# EAGLE board TSOC_NEOLED_R0_1 (EAGLE 6.6.0)
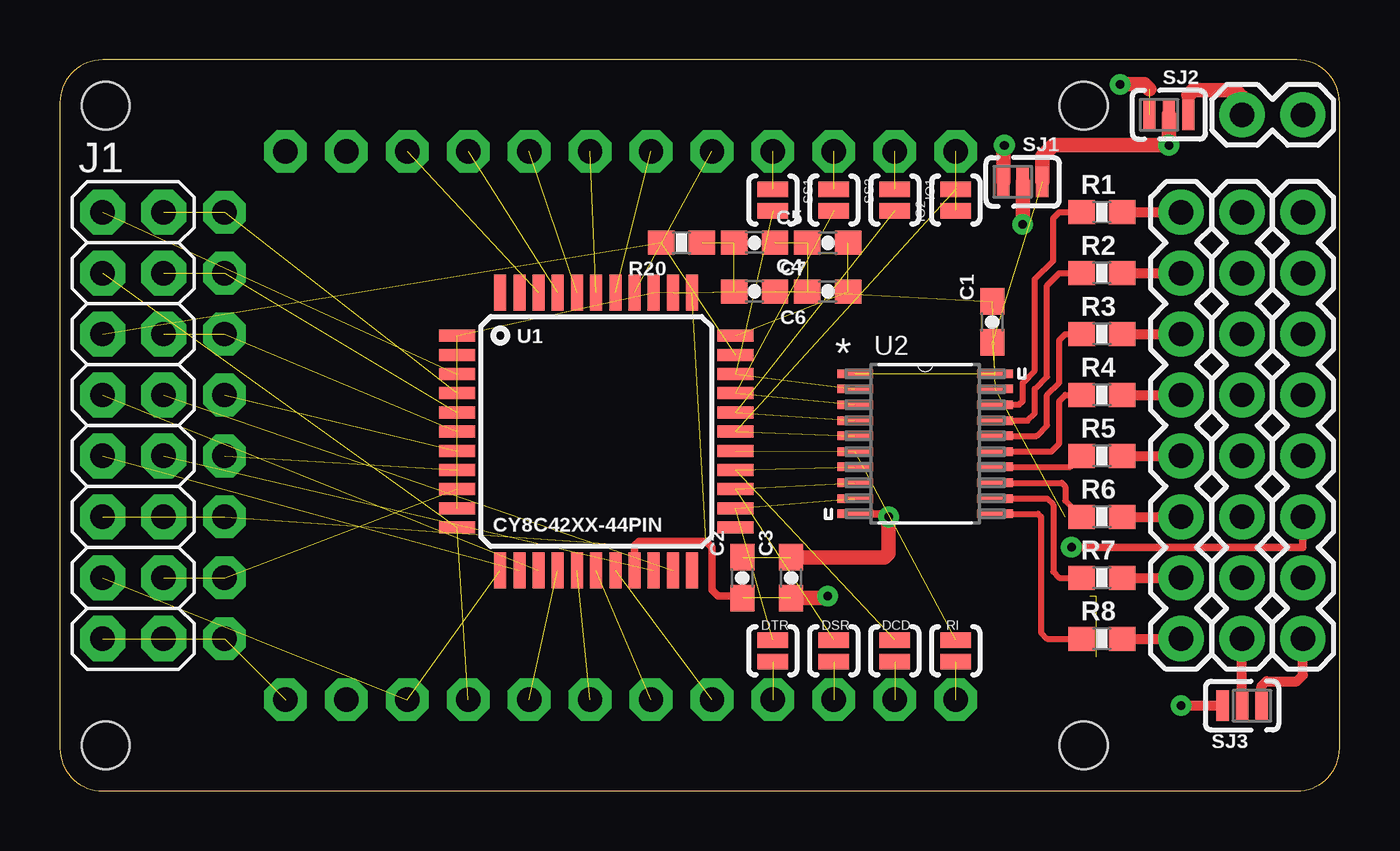
[diagram p0: board, top side]
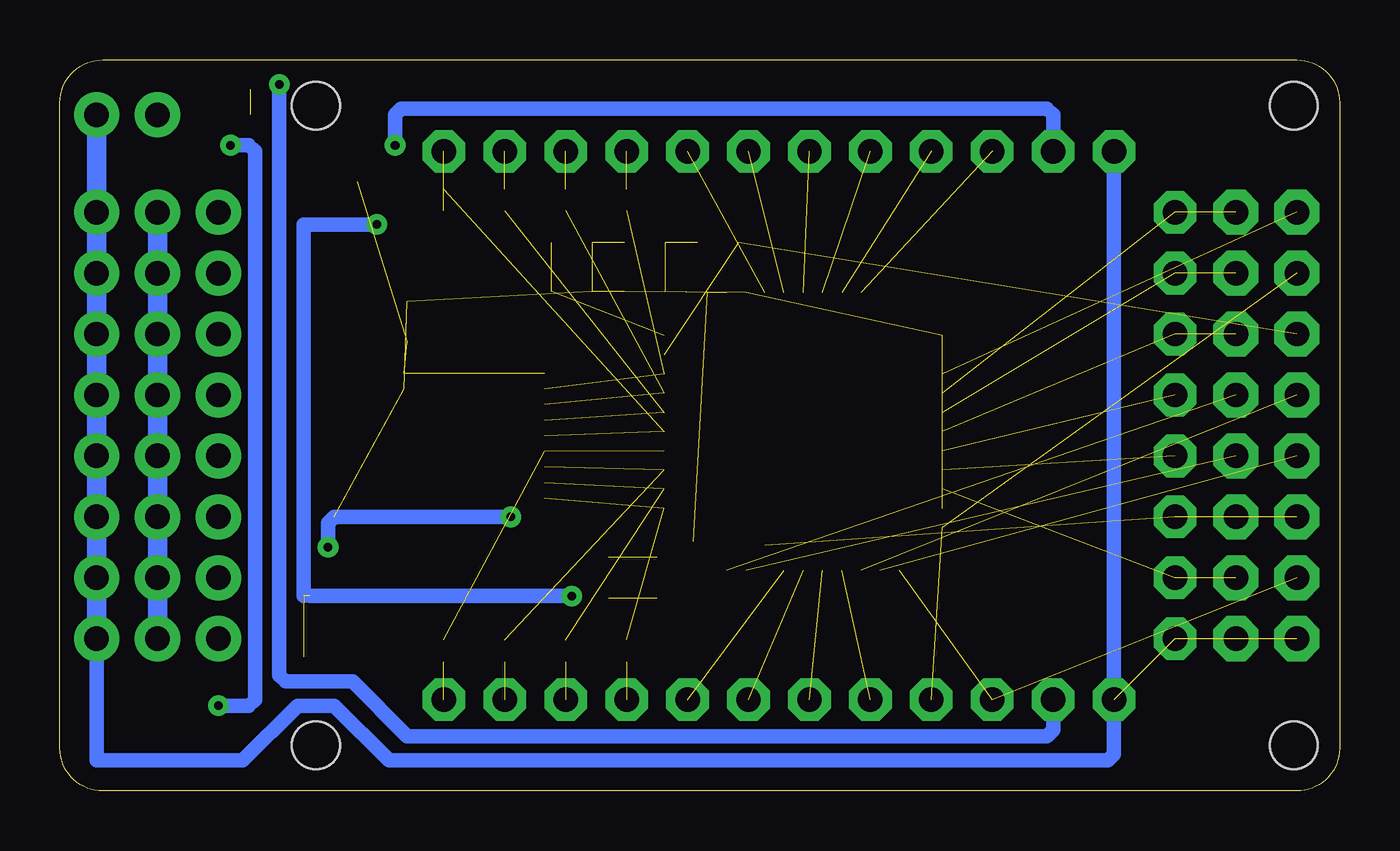
[diagram p1: board, bottom side, seen from below]

Size 53.34 x 30.48 mm. Coordinates in mm from the lower left corner, seen from the top.
Copper layers (1*16): Top 0.035mm / dielectric 1.5mm / Bottom 0.035mm
Design rules "PatternAgents_7mil": minimum track width 7mil, minimum drill 14mil, track to track 7mil, track to pad 7mil, pad to pad 7mil, via to via 7mil, smd to smd 7mil, copper to edge 7mil, drill to drill 7mil, minimum pad ring 12mil, minimum via ring 10mil, stop-mask expansion 4mil, vias tented up to drill 25mil, thermal gap 7mil

## Footprints (pad centres in the part's own frame; a part is rotated, then mirrored left to right if it is on the bottom)
1X02 = drill 1.016 pad 1.88: 1 0,0; 2 2.54,0
0603-CAP = smd 1.1 x 1: 1 -0.85,0; 2 0.85,0
JMP-2-NO = smd 0.635 x 1.27: 1 -0.45,0; 2 0.45,0
2X8 = drill 1.016 pad 1.88 octagon: 1 0,0; 2 0,2.54; 3 2.54,0; 4 2.54,2.54; 5 5.08,0; 6 5.08,2.54; 7 7.62,0; 8 7.62,2.54; 9 10.16,0; 10 10.16,2.54; 11 12.7,0; 12 12.7,2.54; 13 15.24,0; 14 15.24,2.54; 15 17.78,0; 16 17.78,2.54
1X08_ROUND = drill 1.016 pad 1.88: 1 0,0; 2 2.54,0; 3 5.08,0; 4 7.62,0; 5 10.16,0; 6 12.7,0; 7 15.24,0; 8 17.78,0
0603-RES = smd 1.1 x 1: 1 -0.85,0; 2 0.85,0
JMP-3-1_2 = smd 0.508 x 1.27: 1 -0.813,0; 2 0,0; 3 0.813,0
TSOC-BB-S32 = drill 1.016 pad 1.778 octagon: 1B -11.43,-11.43; 1C -11.43,11.43; 1E 19.05,-8.89; 2B -8.89,-11.43; 2C -8.89,11.43; 2E 19.05,-6.35; 3B -6.35,-11.43; 3C -6.35,11.43; 3E 19.05,-3.81; 4B -3.81,-11.43; 4C -3.81,11.43; 4E 19.05,-1.27; 5B -1.27,-11.43; 5C -1.27,11.43; 5E 19.05,1.27; 6B 1.27,-11.43; 6C 1.27,11.43; 6E 19.05,3.81; 7B 3.81,-11.43; 7C 3.81,11.43; 7E 19.05,6.35; 8B 6.35,-11.43; 8C 6.35,11.43; 8E 19.05,8.89; 9B 8.89,-11.43; 9C 8.89,11.43; 10B 11.43,-11.43; 10C 11.43,11.43; 11B 13.97,-11.43; 11C 13.97,11.43; 12B 16.51,-11.43; 12C 16.51,11.43
TQFP-10X10-44 = smd 1.5 x 0.5: 1 -5.8,4; 2 -5.8,3.2; 3 -5.8,2.4; 4 -5.8,1.6; 5 -5.8,0.8; 6 -5.8,0; 7 -5.8,-0.8; 8 -5.8,-1.6; 9 -5.8,-2.4; 10 -5.8,-3.2; 11 -5.8,-4; 23 5.8,-4; 24 5.8,-3.2; 25 5.8,-2.4; 26 5.8,-1.6; 27 5.8,-0.8; 28 5.8,0; 29 5.8,0.8; 30 5.8,1.6; 31 5.8,2.4; 32 5.8,3.2; 33 5.8,4 | smd 0.5 x 1.5: 12 -4,-5.8; 13 -3.2,-5.8; 14 -2.4,-5.8; 15 -1.6,-5.8; 16 -0.8,-5.8; 17 0,-5.8; 18 0.8,-5.8; 19 1.6,-5.8; 20 2.4,-5.8; 21 3.2,-5.8; 22 4,-5.8; 34 4,5.8; 35 3.2,5.8; 36 2.4,5.8; 37 1.6,5.8; 38 0.8,5.8; 39 0,5.8; 40 -0.8,5.8; 41 -1.6,5.8; 42 -2.4,5.8; 43 -3.2,5.8; 44 -4,5.8
SOP65P640X120-20N = smd 1.473 x 0.356: 1 -2.921,2.921; 2 -2.921,2.286; 3 -2.921,1.626; 4 -2.921,0.965; 5 -2.921,0.33; 6 -2.921,-0.33; 7 -2.921,-0.965; 8 -2.921,-1.626; 9 -2.921,-2.286; 10 -2.921,-2.921; 11 2.921,-2.921; 12 2.921,-2.286; 13 2.921,-1.626; 14 2.921,-0.965; 15 2.921,-0.33; 16 2.921,0.33; 17 2.921,0.965; 18 2.921,1.626; 19 2.921,2.286; 20 2.921,2.921
TSOC-BB-BRD-PLUS = hole 2: 1.905,1.905; 28.575,1.905; 1.905,42.672; 28.575,42.672

## Placement (x,y rotation side)
5V  M02  [1X02]  49.28,28.19 0 top
C1  0.1uF  [0603-CAP]  38.86,19.56 90 top
C2  0.1uF  [0603-CAP]  28.45,8.89 90 top
C3  1uF  [0603-CAP]  30.48,8.89 90 top
C4  0.1uF  [0603-CAP]  28.96,20.83 0 top
C5  1uF  [0603-CAP]  28.96,22.86 0 top
C6  0.1uF  [0603-CAP]  32,20.83 180 top
C7  1uF  [0603-CAP]  32,22.86 180 top
DCD  [JMP-2-NO]  34.8,5.84 90 top
DSR  [JMP-2-NO]  32.26,5.84 90 top
DTR  [JMP-2-NO]  29.72,5.84 90 top
IO1  [JMP-2-NO]  34.8,24.64 270 top
IO2  [JMP-2-NO]  37.34,24.64 90 top
J1  [2X8]  1.78,24.13 270 top
J2  [1X08_ROUND]  51.82,24.13 270 top
J3  [1X08_ROUND]  46.74,24.13 270 top
J4  [1X08_ROUND]  49.28,24.13 270 top
R1  [0603-RES]  43.43,24.13 0 top
R2  [0603-RES]  43.43,21.59 0 top
R3  [0603-RES]  43.43,19.05 0 top
R4  [0603-RES]  43.43,16.51 0 top
R5  [0603-RES]  43.43,13.97 0 top
R6  [0603-RES]  43.43,11.43 0 top
R7  [0603-RES]  43.43,8.89 0 top
R8  [0603-RES]  43.43,6.35 0 top
R20  10K  [0603-RES]  25.91,22.86 180 top
RI  [JMP-2-NO]  37.34,5.84 90 top
SJ1  JMP-3-1_2  [JMP-3-1_2]  40.13,25.4 0 top
SJ2  JMP-3-1_2  [JMP-3-1_2]  46.23,28.19 0 top
SJ3  JMP-3-1_2  [JMP-3-1_2]  49.28,3.56 180 top
SS1  [JMP-2-NO]  29.72,24.64 270 top
SS2  [JMP-2-NO]  32.26,24.64 270 top
TSOC  TSOC-32-BB  [TSOC-BB-S32]  25.91,15.24 180 top
U1  CY8C42XX-44PIN  [TQFP-10X10-44]  22.35,14.99 0 top
U2  SN74HC245PW  [SOP65P640X120-20N]  36.07,14.48 0 top
U$3  TSOC-PCB-PLUS  [TSOC-BB-BRD-PLUS]  0,30.48 270 top

## Library data of the parts
5V J1-J4 R1-R8 = PatternAgents-ProtoPads
C1-C7 R20 = PatternAgents-Misc
DCD DSR DTR IO1 IO2 RI SJ1-SJ3 SS1 SS2 = PatternAgents-ProtoPads; BOM: EXCLUDE
TSOC U$3 = thingSoC
U1 = PatternAgents-Cypress
U2 = PatternAgents-TI; MPN: SN74HC245PW; OC_FARNELL: 1236221; OC_NEWARK: 13M5213; PACKAGE: TSSOP-20; SUPPLIER: Texas Instruments

## Nets
3V3: SJ1.1 TSOC.11B
5V0: SJ2.1 TSOC.11C
!DCD: DCD.1 TSOC.2C
!DSR: DSR.1 TSOC.3C
!DTR: DTR.1 TSOC.4C
!R!: RI.1 TSOC.1C
!XRES: J1.5 R20.2 U1.32
GND: 5V.2 C1.2 C2.2 C3.2 C4.2 C5.2 C6.2 C7.2 J1.15 J1.16 J2.1 J2.2 J2.3 J2.4 J2.5 J2.6 J2.7 J2.8 SJ3.1 TSOC.8E TSOC.12B TSOC.12C U1.1 U1.10 U1.36 U2.10 U2.19
IO1: IO1.1 TSOC.2B
IO2: IO2.1 TSOC.1B
N$1: J3.1 R1.2
N$2: J3.2 R2.2
N$3: J3.3 R3.2
N$4: J3.4 R4.2
N$5: J3.5 R5.2
N$6: J3.6 R6.2
N$7: J3.7 R7.2
N$8: J3.8 R8.2
N$9: R1.1 U2.18
N$10: R2.1 U2.17
N$11: R3.1 U2.16
N$12: R4.1 U2.15
N$13: R5.1 U2.14
N$14: R6.1 U2.13
N$15: R7.1 U2.12
N$16: R8.1 U2.11
P0_0: DTR.2 U1.24 U2.9
P0_1: DSR.2 U1.25 U2.8
P0_2: DCD.2 U1.26 U2.7
P0_3: RI.2 U1.27 U2.6
P0_4: IO2.2 U1.28 U2.5
P0_5: IO1.2 U1.29 U2.4
P0_6: SS2.2 U1.30 U2.3
P0_7: SS1.2 U1.31 U2.2
P1_0: TSOC.5B U1.37
P1_1: TSOC.6B U1.38
P1_2: TSOC.7B U1.39
P1_3: TSOC.8B U1.40
P1_4: TSOC.9B U1.41
P1_5: TSOC.10B U1.42
P1_6: U1.43
P1_7: U1.44
P2_0: U1.2
P2_1: J1.1 U1.3
P2_2: J1.2 TSOC.1E U1.4
P2_3: J1.4 TSOC.2E U1.5
P2_4: J1.6 TSOC.3E U1.6
P2_5: TSOC.4E U1.7
P2_6: TSOC.5E U1.8
P2_7: J1.14 TSOC.7E U1.9
P3_0: J1.3 TSOC.9C U1.11
P3_1: J1.13 TSOC.10C U1.12
P3_2: J1.9 U1.13
P3_3: J1.7 U1.14
P3_4: TSOC.8C U1.15
P3_5: TSOC.7C U1.16
P3_6: TSOC.6C U1.17
P3_7: TSOC.5C U1.18
P4_0: J1.10 U1.20
P4_1: J1.8 U1.21
P4_2: U1.22
P4_3: U1.23
SS1: SS1.1 TSOC.4B
SS2: SS2.1 TSOC.3B
VCC: C2.1 C3.1 C4.1 C5.1 J1.11 J1.12 R20.1 SJ1.2 TSOC.6E U1.19 U1.34 U1.35
VCCD: C6.1 C7.1 U1.33
VEXT: 5V.1 SJ2.3
VIN: C1.1 SJ1.3 SJ2.2 SJ3.3 U2.1 U2.20
VOUT: J4.1 J4.2 J4.3 J4.4 J4.5 J4.6 J4.7 J4.8 SJ3.2

## Tracks (layer width: path | path; a pad name or v marks a point on that pad's centre or on a via)
3V3  (via drill 0.36)
  Top 0.61: SJ1.1 39.32,26.87 v39.37,26.92
  Bottom 0.61: TSOC.11B 11.94,28.19 12.19,28.45 39.12,28.45 39.37,28.19 v39.37,26.92
5V0  (via drill 0.36)  (1 unrouted)
  Top 0.61: 45.41,29.26 45.21,29.46 v44.2,29.46
  Bottom 0.61: v44.2,29.46 44.2,4.83 43.94,4.57 41.15,4.57 38.86,2.29 12.19,2.29 11.94,2.54 TSOC.11C
!DCD  (1 unrouted)
!DSR  (1 unrouted)
!DTR  (1 unrouted)
!R!  (1 unrouted)
!XRES  (2 unrouted)
GND  (via drill 0.36)  (13 unrouted)
  Top 0.305: v42.16,10.16 51.82,10.16 J2.6 | U2.10 34.42,11.56 v34.54,11.43
  Top 0.406: SJ3.1 50.09,4.37 50.29,4.57 51.56,4.57 51.82,4.83 J2.8
  Top 0.61: C3.2 34.38,9.74 34.54,9.91 v34.54,11.43
  Bottom 0.61: TSOC.12B TSOC.12C 9.4,1.52 9.65,1.27 39.62,1.27 41.91,3.56 43.43,3.56 45.72,1.27 51.82,1.27 J2.8 | v34.54,11.43 41.91,11.43 42.16,11.18 v42.16,10.16
  Bottom 0.813: 5V.2 J2.1 J2.2 J2.3 J2.4 J2.5 J2.6 J2.7 J2.8
IO1  (1 unrouted)
IO2  (1 unrouted)
N$1
  Top 0.406: R1.2 J3.1
N$2
  Top 0.406: R2.2 J3.2
N$3
  Top 0.406: R3.2 J3.3
N$4
  Top 0.406: R4.2 J3.4
N$5
  Top 0.406: R5.2 J3.5
N$6
  Top 0.406: R6.2 J3.6
N$7
  Top 0.406: R7.2 J3.7
N$8
  Top 0.406: R8.2 J3.8
N$9
  Top 0.254: U2.18 39.98,16.1 40.13,16.26 40.13,17.02 40.64,17.53 40.64,21.34 41.4,22.1 41.4,23.88 41.66,24.13 R1.1
N$10
  Top 0.254: U2.17 40.34,15.44 40.64,15.75 40.64,16.76 41.15,17.27 41.15,21.08 41.66,21.59 R2.1
N$11
  Top 0.254: U2.16 40.72,14.81 41.15,15.24 41.15,16.51 41.66,17.02 41.66,18.8 41.91,19.05 R3.1
N$12
  Top 0.254: U2.15 41.33,14.15 41.66,14.48 41.66,16.26 41.91,16.51 R4.1
N$13
  Top 0.254: U2.14 42.13,13.51 R5.1
N$14
  Top 0.254: U2.13 41.76,12.85 41.91,12.7 41.91,12.1 R6.1
N$15
  Top 0.254: U2.12 41.15,12.19 41.4,11.94 41.4,9.14 41.66,8.89 R7.1
N$16
  Top 0.254: U2.11 40.77,11.56 40.89,11.43 40.89,6.6 41.15,6.35 R8.1
P0_0  (2 unrouted)
P0_1  (2 unrouted)
P0_2  (2 unrouted)
P0_3  (2 unrouted)
P0_4  (2 unrouted)
P0_5  (2 unrouted)
P0_6  (2 unrouted)
P0_7  (2 unrouted)
P1_0  (1 unrouted)
P1_1  (1 unrouted)
P1_2  (1 unrouted)
P1_3  (1 unrouted)
P1_4  (1 unrouted)
P1_5  (1 unrouted)
P2_1  (1 unrouted)
P2_2  (2 unrouted)
P2_3  (2 unrouted)
P2_4  (2 unrouted)
P2_5  (1 unrouted)
P2_6  (1 unrouted)
P2_7  (2 unrouted)
P3_0  (2 unrouted)
P3_1  (2 unrouted)
P3_2  (1 unrouted)
P3_3  (1 unrouted)
P3_4  (1 unrouted)
P3_5  (1 unrouted)
P3_6  (1 unrouted)
P3_7  (1 unrouted)
P4_0  (1 unrouted)
P4_1  (1 unrouted)
SS1  (1 unrouted)
SS2  (1 unrouted)
VCC  (via drill 0.36)  (11 unrouted)
  Top 0.305: U1.19 23.95,10.24 24.13,10.41 26.92,10.41 27.18,10.16 27.18,8.38 27.43,8.13 28.36,8.13 C2.1
  Top 0.61: SJ1.2 v40.13,23.62 | C3.1 31.92,8.04 v32,8.13
  Bottom 0.61: v40.13,23.62 43.18,23.62 43.18,8.13 | v32,8.13 42.93,8.13
VCCD  (2 unrouted)
VEXT
  Top 0.406: SJ2.3 47.04,29.01
  Top 0.61: 47.04,29.01 47.24,29.21 49.02,29.21 49.28,28.96 5V.1
VIN  (via drill 0.36)  (3 unrouted)
  Top 0.406: SJ3.3 v46.74,3.56
  Top 0.61: SJ2.2 v46.23,26.92 41.4,26.92 40.95,26.47 SJ1.3
  Bottom 0.61: v46.23,26.92 45.47,26.92 45.21,26.67 45.21,3.81 45.47,3.56 v46.74,3.56
VOUT
  Top 0.406: SJ3.2 J4.8
  Bottom 0.813: J4.1 J4.2 J4.3 J4.4 J4.5 J4.6 J4.7 J4.8